# Allegro board XR872ET_REF2_SAMPLE_V1_0-20191008.brd
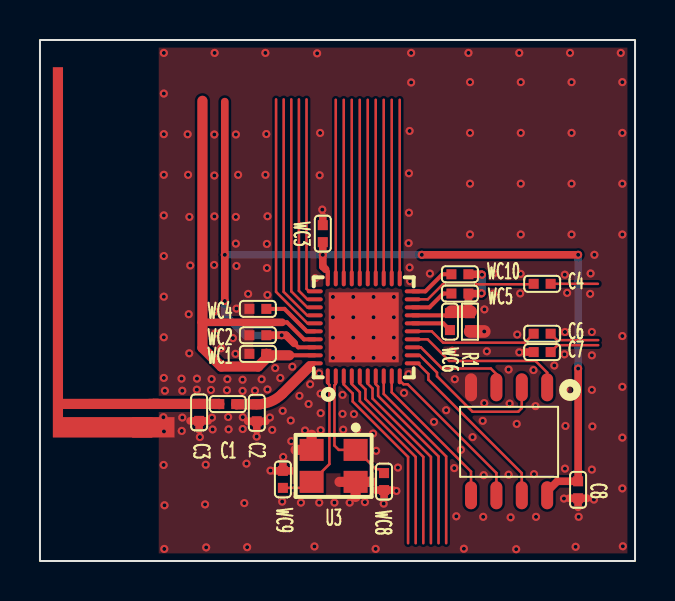
[diagram p0: board, top side]
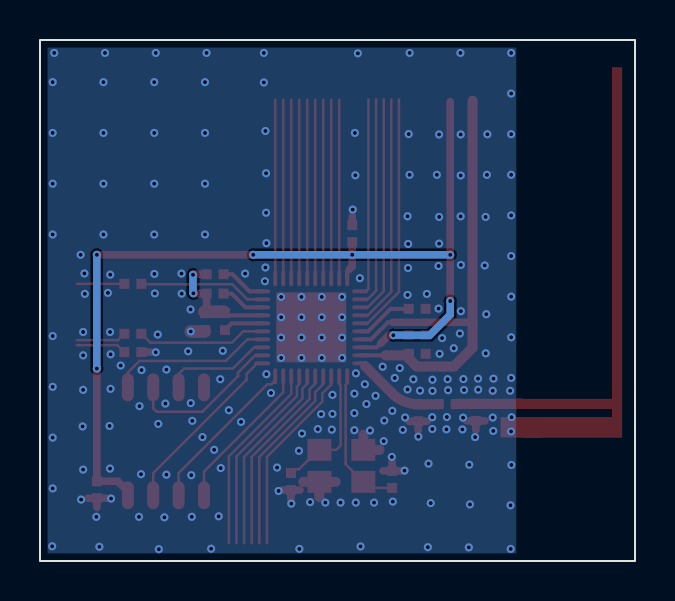
[diagram p1: board, bottom side, seen from below]

Outline 29.77 x 26.06 mm; copper layers: TOP, BOTTOM. Coordinates in mm from the lower left corner of the outline.
Outline path: rectangle 0,0 29.77,26.06

## Placement (name value [footprint] x y rotation side)
C1  0R  [C0402]  9.39 7.85 180 top
C2  NC  [C0402]  10.85 7.41 90 top
C3  NC  [C0402]  7.96 7.43 90 top
C4  104  [C0402]  25.12 13.86 180 top
C6  104  [C0402]  25.12 11.37 180 top
C7  104  [C0402]  25.12 10.45 180 top
C8  NC-104  [C0402]  26.92 3.56 90 top
JW1  ANT-F  [ANT2B18_54X5_30]  5.69 7.86 90 top
R1  0R  [R0402]  21.51 11.97 90 top
U1  XR872ET  [QFN40P0_40B5_00X5_00]  16.2 11.69 90 top
U3  40MHz-E3SB40MHz  [CRY-TSX3225]  14.69 4.76 270 top
U4  SPI_NOR_16Mb  [SOP8_150MIL]  23.47 5.96 270 top
WC1  1uF  [C0402]  10.9 10.36 180 top
WC2  NC-1uF  [C0402]  10.9 11.29 180 top
WC3  1uF  [C0402]  14.15 16.37 90 top
WC4  1uF  [C0402]  10.9 12.61 0 top
WC5  0.47uF  [C0402]  21.01 13.38 180 top
WC6  0.47uF  [C0402]  20.51 11.98 270 top
WC8  10pF  [C0402]  17.21 3.97 270 top
WC9  10pF  [C0402]  12.15 4.08 270 top
WC10  1uF  [C0402]  21.01 14.34 180 top

## Library data of the parts
C1-C4 C6 C7 WC1-WC6 WC8 WC10 = CAPACITOR
C8 WC9 = CAPACITOR_0
JW1 = ANT-F_1
R1 = R1 0805
U1 = XR872ET_10
U3 = Crystal4Pin_0
U4 = SPI-NOR-SO8

## Footprints (pads in the part's own frame, mm; a bottom-side part is the same pattern mirrored in y, then rotated)
ANT2B18_54X5_30
  rect 1.016x1.016 smd: 1(-1.168,0.577)
  rect 0.508x0.508 smd: 2(0,0)
C0402
  rect 0.5x0.5 smd: 1(-0.425,0) 2(0.425,0)
CRY-TSX3225
  rect 1.1x1.2 smd: 1(-0.8,1.1) 2(-0.8,-1.1) 3(0.8,-1.1) 4(0.8,1.1)
QFN40P0_40B5_00X5_00
  oval 0.8x0.2 smd: 1(-2.45,1.8) 2(-2.45,1.4) 3(-2.45,1) 4(-2.45,0.6) 5(-2.45,0.2) 6(-2.45,-0.2) 7(-2.45,-0.6) 8(-2.45,-1) 9(-2.45,-1.4) 10(-2.45,-1.8) 21(2.45,-1.8) 22(2.45,-1.4) 23(2.45,-1) 24(2.45,-0.6) 25(2.45,-0.2) 26(2.45,0.2) 27(2.45,0.6) 28(2.45,1) 29(2.45,1.4) 30(2.45,1.8)
  oval 0.2x0.8 smd: 11(-1.8,-2.45) 12(-1.4,-2.45) 13(-1,-2.45) 14(-0.6,-2.45) 15(-0.2,-2.45) 16(0.2,-2.45) 17(0.6,-2.45) 18(1,-2.45) 19(1.4,-2.45) 20(1.8,-2.45) 31(1.8,2.45) 32(1.4,2.45) 33(1,2.45) 34(0.6,2.45) 35(0.2,2.45) 36(-0.2,2.45) 37(-0.6,2.45) 38(-1,2.45) 39(-1.4,2.45) 40(-1.8,2.45)
  rect 3.5x3.5 smd: 41(0,0)
R0402
  rect 0.5x0.5 smd: 1(-0.425,0) 2(0.425,0)
SOP8_150MIL
  oval 1.4x0.6 smd: 1(-2.725,1.905) 2(-2.725,0.635) 3(-2.725,-0.635) 4(-2.725,-1.905) 5(2.675,-1.905) 6(2.675,-0.635) 7(2.675,0.635) 8(2.675,1.905)

## Nets
AVDD: U1.20(AVDD) WC10.2
GND: C2.1 C3.1 C7.2 C8.1 JW1.1(A) R1.1 U1.41(EPAD) U3.2 U3.4(5) U4.4(VSS) WC1.2 WC2.2 WC3.2 WC4.1 WC8.2 WC9.1
VCC-BAT: U1.37(VDD_EXT) U1.39(VBAT) WC1.1
VDD-ANA: C8.2 U1.30(VDDIO) U1.38(VDD_ANA) U4.8(VCC) WC2.1 WC3.1
ANT: C1.2 C3.2 JW1.2(G)
CHIP-PWD: U1.35(CHIP_PWD)
HXTAL1: U1.2(HXTAL1) U3.1 WC8.1
HXTAL2: U1.1(HXTAL2) U3.3 WC9.2
LOUTP: C6.2 U1.15(LOUTP)
MICP: C4.2 U1.19(MICP)
PA0: U1.5(PA0/SPI1_MOSI/SD_CMD/TWI1_SCL/C)
PA1: U1.6(PA1/SPI1_MISO/SD_DATA0/TWI1_SDA)
PA2: U1.7(PA2/SPI1_CLK/SD_CLK/UART0_TX/CS)
PA3: U1.8(PA3/SPI1_CS0/SD_DATA1/UART0_RX/)
PA4: U1.29(PA4/WUPIO0/UART1_RTS/SD_DATA2/T)
PA5: U1.28(PA5/WUPIO1/UART1_CTS/SD_DATA3/T)
PA6: U1.27(PA6/WUPIO2/UART1_RX/SPI1_CS1/TW)
PA7: U1.26(PA7/WUPIO3/UART1_TX/SPI1_CS2/TW)
PA8: U1.34(PA8/FEM_CTRL1/PWM0/TWI1_SCL/CSI)
PA9: U1.33(PA9/FEM_CTRL2/PWM1/TWI1_SDA/CSI)
PA10: U1.32(PA10/ADC_CH0/PWM2/CSI_HSYNC/EIN)
PA11: U1.31(PA11/ADC_CH1/PWM3/CSI_VSYNC/EIN)
PA19: U1.25(PA19/WUPIO5/UART2_RTS/TWI0_SCL/)
PA20: U1.24(PA20/WUPIO6/UART2_CTS/TWI0_SDA/)
PA21: U1.23(PA21/WUPIO7/UART2_RX/PWM2/SPI1_)
PA22: U1.22(PA22/WUPIO8/UART2_TX/PWM3/SPI1_)
PA23: U1.21(PA23/WUPIO9/TEST/EXT_DCDC_PUP/F)
PB2: U1.13(PB2/SWD_TMS/JTAG_TDO/PWM6/FLASH) U4.3(WP#)
PB3: U1.11(PB3/SWD_TCK/JTAG_TDI/PWM7/FLASH) U4.7(HOLD#)
RF: C1.1 C2.2 U1.40(ANT)
SPI0-CLK: U1.10(PB7/SPI0_CLK/SD_CLK/UART1_RTS/F) U4.6(CLK)
SPI0-CS: U1.14(PB6/SPI0_CS0///UART1_CTS/FLASH_) U4.1(CS#)
SPI0-MISO: U1.12(PB5/SPI0_MISO/SD_DATA0/UART1_RX) U4.2(MISO)
SPI0-MOSI: U1.9(PB4/SPI0_MOSI/SD_CMD/UART1_TX/F) U4.5(MOSI)
UART0-RX: U1.4(PB1/UART0_RX/JTAG_TCK/PWM5/SWD_)
UART0-TX: U1.3(PB0/UART0_TX/JTAG_TMS/PWM4/SWD_)
N17086920: U1.16(VRA2) WC6.2
N17137155: U1.18(VRA1) WC5.2
N17137435: R1.2 U1.17(AGND) WC5.1 WC6.1 WC10.1
N17142175: U1.36(VDD_DIG) WC4.2
N17214059: C4.1
N17214344: C7.1
N17214346: C6.1

## Via types
v1: diameter 0.406, hole 0.203, TOP to BOTTOM, 228 vias

## Routing (per net, layer and track width the routed paths; a pad name or vN(x,y) marks a point on that pad's centre or on a via; arc(x,y) is an arc through that point)
AVDD: length 2.3
  TOP w0.203: WC10.2 20.14,14.34 19.28,13.49 U1.20
GND: length 12.9
  TOP w0.203: R1.1 21.51,11.49 21.52,11.48
  TOP w0.381: C8.1 27.38,3.14 ; C8.1 26.47,3.14 ; C8.1 26.92,2.68 ; 7.51,7.01 C3.1 ; C3.1 8.42,7.01 ; C3.1 7.96,6.55 ; R1.1 21.96,11.54 ; 10.39,6.99 C2.1 ; C2.1 11.3,6.99 ; C2.1 10.85,6.53 ; 24.24,10.45 C7.2 ; 17.21,3.09 WC8.2 ; WC8.2 17.67,3.55 ; WC8.2 16.76,3.55 ; WC3.2 14.15,17.25 ; WC9.1 12.15,4.96 ; WC9.1 11.7,4.51 ; WC9.1 12.61,4.51
  TOP w0.508: 14.99,3.96 U3.4 ; U3.4 15.79,3.2 ; U3.4 16.59,3.96 ; 13.59,6.31 U3.2 12.79,5.56
  TOP w0.635: v1(22.23,11.48) 21.52,11.48
  vias: v1(6.2,25.41) v1(6.2,23.38) v1(6.2,21.35) v1(6.2,19.32) v1(6.2,17.29) v1(6.2,15.25) v1(6.2,13.22) v1(6.2,11.19) v1(6.2,9.16) v1(6.25,8.52) v1(6.17,7.19) v1(6.2,6.48) v1(6.19,4.8) v1(6.23,2.79) v1(6.22,0.6) v1(7.08,9.12) v1(7.12,8.52) v1(7.12,7.18) v1(7.09,6.51) v1(7.39,21.35) v1(7.41,19.32) v1(7.44,12.34) v1(7.48,17.21) v1(7.52,14.78) v1(7.47,10.39) v1(7.85,8.57) v1(7.85,9.12) v1(8,6.2) v1(8.29,4.82) v1(8.26,2.83) v1(8.31,0.68) v1(8.59,9.1) v1(8.55,8.55) v1(8.6,7.17) v1(8.64,6.58) v1(8.74,25.41) v1(8.72,21.33) v1(8.72,19.28) v1(8.72,17.24) v1(8.71,14.81) v1(8.71,12.5) v1(8.76,11.38) v1(9.07,10.64) v1(9.37,9.09) v1(9.35,8.54) v1(9.41,7.2) v1(9.44,6.59) v1(9.65,11.15) v1(9.8,21.33) v1(9.8,17.21) v1(9.8,15.88) v1(9.83,14.76) v1(9.83,12.62) v1(9.78,10.36) v1(9.91,19.32) v1(10.13,9.07) v1(10.13,8.51) v1(10.15,7.19) v1(10.14,6.6) v1(10.22,2.9) v1(10.33,4.87) v1(10.41,13.36) v1(10.36,0.69) v1(10.76,8.52) v1(10.84,6.22) v1(11.09,9.09) v1(11.28,25.41) v1(11.32,21.36) v1(11.28,19.32) v1(11.35,15.86) v1(11.38,17.24) v1(11.35,14.66) v1(11.38,13.31) v1(11.38,8.58) v1(11.5,7.18) v1(11.53,4.52) v1(11.62,6.56) v1(11.77,9.65) v1(12.02,9.16) v1(12.14,7.51) v1(12.12,2.97) v1(12.17,5.21) v1(12.54,7.03) v1(12.62,9.72) v1(12.57,5.99) v1(12.98,8.26) v1(13.06,2.92) v1(13.26,6.53) v1(13.44,7.85) v1(13.52,8.84) v1(13.73,0.73) v1(13.77,14.15) v1(13.87,25.39) v1(14.01,21.41) v1(13.99,19.29) v1(13.96,9.39) v1(14.04,8.37) v1(14.04,7.4) v1(14.04,6.54) v1(13.97,2.92) v1(14.12,17.58) v1(14.66,13.21) v1(14.66,12.19) v1(14.66,11.18) v1(14.66,10.16) v1(14.73,2.92) v1(15.14,8.31) v1(15.14,7.36) v1(15.17,6.57) v1(15.49,2.92) v1(15.67,13.21) v1(15.67,12.19) v1(15.67,11.18) v1(15.67,10.16) v1(15.71,7.35) v1(15.87,6.6) v1(16.26,2.95) v1(16.69,13.21) v1(16.69,12.19) v1(16.69,11.18) v1(16.69,10.16) v1(16.66,6.38) v1(16.81,5.51) v1(16.79,0.61) v1(17.2,2.87) v1(17.7,13.21) v1(17.7,12.19) v1(17.7,11.18) v1(17.7,10.16) v1(17.83,3.51) v1(17.91,4.67) v1(18.21,8.41) v1(18.44,15.9) v1(18.44,9.35) v1(18.49,21.51) v1(18.46,19.39) v1(18.46,17.42) v1(18.49,14.68) v1(18.52,14) v1(18.57,25.41) v1(18.57,23.94) v1(19.51,14.38) v1(19.71,6.96) v1(20.32,7.54) v1(20.62,10.52) v1(20.73,4.65) v1(20.75,9.09) v1(20.83,2.24) v1(21.06,5.56) v1(21.21,0.61) v1(21.44,25.41) v1(21.51,23.95) v1(21.51,21.41) v1(21.51,18.87) v1(21.51,16.33) v1(21.64,6.2) v1(22.15,7.01) v1(22.23,12.58) v1(22.23,7.9) v1(22.2,4.29) v1(22.17,2.21) v1(22.36,10.49) v1(22.69,14.38) v1(22.68,13.37) v1(23.44,9.58) v1(23.44,4.32) v1(23.5,7.87) v1(23.55,2.18) v1(23.82,0.59) v1(23.88,11.33) v1(23.85,6.86) v1(23.98,25.41) v1(24.05,14.36) v1(24.02,13.38) v1(23.98,10.44) v1(24.05,23.95) v1(24.05,21.41) v1(24.05,18.87) v1(24.05,16.33) v1(24.69,9.55) v1(24.71,4.34) v1(24.79,7.75) v1(24.82,2.21) v1(25.73,9.78) v1(26.24,10.34) v1(26.24,8.61) v1(26.21,3.12) v1(26.26,14.32) v1(26.26,11.46) v1(26.29,6.76) v1(26.26,4.62) v1(26.37,13.41) v1(26.52,25.41) v1(26.59,23.95) v1(26.59,21.41) v1(26.59,18.87) v1(26.59,16.33) v1(26.8,0.71) v1(26.95,2.21) v1(27.55,14.38) v1(27.52,13.36) v1(27.61,11.46) v1(27.61,10.29) v1(27.61,8.56) v1(27.64,6.73) v1(27.61,4.57) v1(27.74,15.32) v1(27.71,3.07) v1(29.06,25.41) v1(29.13,23.95) v1(29.13,21.41) v1(29.13,18.87) v1(29.13,16.33) v1(29.13,11.25) v1(29.13,8.71) v1(29.13,6.17) v1(29.13,3.63) v1(29.16,0.74)
VCC-BAT: length 24.8
  TOP w0.203: 12.12,11.94 12.36,11.94 13.21,11.09 U1.37 ; 12.47,10.29 U1.39
  TOP w0.381: 8.13,11.94 12.12,11.94
  TOP w0.508: 12.47,10.29 11.4,10.29 WC1.1 11.33,10.14 10.91,9.73 9.07,9.73 8.13,10.67 8.13,23.02
VDD-ANA: length 49.5
  TOP w0.203: 12.72,10.88 12.92,10.69 U1.38 ; 14.29,14.59 14.4,14.48 U1.30
  TOP w0.381: 12.72,10.88 12.31,11.29 v1(12.09,11.29) WC2.1 ; v1(19.1,15.32) v1(26.92,15.32) ; 9.25,22.98 v1(9.25,15.32) v1(9.25,13) ; WC3.1 v1(14.15,15.32) 14.15,14.73 14.29,14.59 ; U4.8 25.37,3.48 25.88,3.99 C8.2 26.92,3.99 v1(26.92,9.63)
  BOTTOM w0.381: v1(9.25,15.32) v1(14.15,15.32) v1(19.1,15.32) ; v1(9.25,13) 9.25,12.32 10.27,11.29 v1(12.09,11.29) ; v1(26.92,9.63) v1(26.92,15.32)
ANT: length 3.3
  TOP w0.508: C1.2 8.96,7.86 C3.2 5.69,7.86 JW1.2
CHIP-PWD: length 12.2
  TOP w0.127: 11.81,23.09 11.81,13.46 13.39,11.89 U1.35
HXTAL1: length 6.5
  TOP w0.127: WC8.1 17.02,4.59 16.81,4.59 15.84,5.56 U3.1 14.95,5.56 14.73,5.77 14.73,8.79 14.8,8.85 U1.2
HXTAL2: length 7.2
  TOP w0.127: WC9.2 13.29,3.66 U3.3 14.48,4.85 14.48,8.81 14.4,8.89 U1.1
LOUTP: length 6.5
  TOP w0.127: C6.2 24.25,10.92 20.17,10.92 19.6,11.49 U1.15
MICP: length 6.4
  TOP w0.127: U1.19 19.4,13.09 20.15,13.84 24.68,13.84 C4.2
PA0: length 9.7
  TOP w0.127: U1.5 16,8.87 16.28,8.59 16.28,8.1 19.18,5.21 19.18,0.89
PA1: length 9.7
  TOP w0.127: U1.6 16.4,8.87 16.64,8.63 16.64,8.13 19.56,5.21 19.56,0.89
PA2: length 9.6
  TOP w0.127: U1.7 16.8,8.84 16.92,8.72 16.92,8.26 19.94,5.23 19.94,0.89
PA3: length 9.6
  TOP w0.127: U1.8 17.2,8.36 20.32,5.23 20.32,0.89
PA4: length 8.9
  TOP w0.127: 14.8,23.07 U1.29
PA5: length 8.9
  TOP w0.127: U1.28 15.2,23.07
PA6: length 8.9
  TOP w0.127: U1.27 15.6,23.07
PA7: length 8.9
  TOP w0.127: U1.26 16,23.07
PA8: length 11.7
  TOP w0.127: 12.19,23.09 12.19,13.46 13.37,12.29 U1.34
PA9: length 11.1
  TOP w0.127: 12.57,23.09 12.57,13.49 13.37,12.69 U1.33
PA10: length 10.5
  TOP w0.127: U1.32 13.38,13.09 12.95,13.51 12.95,23.09
PA11: length 9.9
  TOP w0.127: 13.34,23.09 13.34,13.61 13.46,13.49 U1.31
PA19: length 8.9
  TOP w0.127: U1.25 16.4,23.07
PA20: length 8.9
  TOP w0.127: U1.24 16.8,23.07
PA21: length 8.9
  TOP w0.127: U1.23 17.2,23.07
PA22: length 8.9
  TOP w0.127: U1.22 17.6,23.07
PA23: length 8.9
  TOP w0.127: U1.21 18,23.07
PB2: length 5.4
  TOP w0.127: U1.13 19.06,10.69 20.12,9.63 22.56,9.63 22.83,9.35 U4.3
PB3: length 9
  TOP w0.127: U1.11 18.9,9.89 19.43,9.35 19.43,9.07 24.1,4.4 U4.7
RF: length 4.7
  TOP w0.203: U1.40 13.62,9.89 13.49,9.73
  TOP w0.508: 13.49,9.73 12.13,8.37 arc(11.54,7.98) C2.2 9.83,7.84 C1.1
SPI0-CLK: length 8.1
  TOP w0.127: U4.6 22.83,4.4 18.4,8.84 18.19,8.84 18,9.03 U1.10
SPI0-CS: length 8.2
  TOP w0.127: U4.1 25.37,9.42 24.79,10.01 20.47,10.01 19.39,11.09 U1.14
SPI0-MISO: length 7.8
  TOP w0.127: U1.12 19,10.29 19.86,9.42 19.86,9.25 21.64,7.47 23.93,7.47 24.1,7.64 U4.2
SPI0-MOSI: length 7.6
  TOP w0.127: U1.9 17.6,8.44 21.56,4.47 U4.5
UART0-RX: length 9.7
  TOP w0.127: U1.4 15.6,8.85 16,8.44 16,8 18.8,5.21 18.8,0.89
UART0-TX: length 9.7
  TOP w0.127: 18.41,0.89 18.41,5.21 15.65,7.98 15.65,8.38 15.2,8.83 U1.3
N17086920: length 2
  TOP w0.203: WC6.2 20.17,11.89 U1.16
N17137155: length 2.2
  TOP w0.203: U1.18 19.49,12.69 20.18,13.38 WC5.2
N17137435: length 6.3
  TOP w0.203: 21.51,12.44 21.54,12.47 ; 20.58,12.47 WC6.1 20.4,12.29 U1.17
  TOP w0.381: R1.2 21.51,12.44 21.43,12.52 WC5.1 22.08,13.38 v1(22.09,13.39) ; WC10.1 22.09,14.34 v1(22.11,14.32)
  TOP w0.635: 21.54,12.47 20.58,12.47
  BOTTOM w0.381: v1(22.11,14.32) 22.11,13.41 v1(22.09,13.39)
N17142175: length 2.9
  TOP w0.203: U1.36 13.35,11.49 12.23,12.61 WC4.2
N17214059: length 2.4
  TOP w0.127: C4.1 27.91,13.86
N17214344: length 2.5
  TOP w0.127: C7.1 25.89,10.79 27.93,10.79
N17214346: length 2.5
  TOP w0.127: 27.93,11.05 25.87,11.05 C6.1

## Copper pours and planes (outline as drawn; the poured copper is in the pictures)
GND on TOP (solid shape): 6.73,6.18 4.62,6.18 4.62,7.2 6.73,7.2
GND on TOP, BOTTOM: 0.38,0.38 0.38,25.68 29.39,25.68 29.39,0.38
Net_45 on TOP (solid shape): 1.15,8.11 5.94,8.11 5.94,7.6 1.15,7.6 1.15,7.2 5.62,7.2 5.62,6.18 0.64,6.18 0.64,24.7 1.15,24.7

## Text on the board
DISPLAY_TOP: FIGURE | SIZE | 7.99 | 19.69 | DRILL CHART: TOP to BOTTOM | ALL UNITS ARE IN MILS | PLATED | QTY | 244 | 44
